# EAGLE board mrShark Blanco-Adapter (EAGLE 6.1)

Size 26 x 31 mm. Coordinates in mm from the lower left corner, seen from the top.
Outline: 0,3.47 0,18.5 7,18.5 7,26.5 0,26.5 0,27.53 3.47,31 22.53,31 26,27.53 26,3.47 22.53,0 21,0 21,3.5 14.5,3.5 14.5,0 3.47,0 0,3.47
Copper layers (1*16): Top 0.035mm / dielectric 1.5mm / Bottom 0.035mm
Design rules: minimum track width 10mil, minimum drill 24mil, track to track 8mil, track to pad 8mil, pad to pad 8mil, via to via 8mil, smd to smd 8mil, copper to edge 40mil, drill to drill 8mil, minimum pad ring 10mil, minimum via ring 8mil, stop-mask expansion 4mil, vias tented up to drill 0mil, thermal gap 10mil

## Footprints (pad centres in the part's own frame; a part is rotated, then mirrored left to right if it is on the bottom)
DF12-20DS = smd 0.32 x 1.62: 1 -2.25,1.81; 2 -1.75,1.81; 3 -1.25,1.81; 4 -0.75,1.81; 5 -0.25,1.81; 6 0.25,1.81; 7 0.75,1.81; 8 1.25,1.81; 9 1.75,1.81; 10 2.25,1.81; 11 2.25,-1.81; 12 1.75,-1.81; 13 1.25,-1.81; 14 0.75,-1.81; 15 0.25,-1.81; 16 -0.25,-1.81; 17 -0.75,-1.81; 18 -1.25,-1.81; 19 -1.75,-1.81; 20 -2.25,-1.81

## Placement (x,y rotation side)
CON1  DF12-20DS  [DF12-20DS]  13,16 270 bottom

## Library data of the parts
CON1 = con-hirose

## Nets
ADC0: CON1.3
ADC1: CON1.2
ADC7: CON1.7
BAT1+: CON1.4
BAT2+: CON1.5
GND: CON1.6 CON1.12 CON1.15 CON1.16
INT0: CON1.14
INT1: CON1.13
MISO: CON1.9
MOSI: CON1.10
RESET: CON1.17
RXD: CON1.1
SCK: CON1.8
SCL: CON1.18
SDA: CON1.19
TXD: CON1.20
VCC: CON1.11

## Tracks (layer width: path | path; a pad name or v marks a point on that pad's centre or on a via)
GND  (3 unrouted)
(copper drawn outside any net)
  shapes: Bottom area x3, Top area x3